# Altium PCB waffling60-MXHS.PcbDoc (part 1 of 3)
Units mm, origin at the board's own origin, x right, y up, seen from the top; angles counter-clockwise.
Board outline 284.81 x 94.3 mm, 2 copper layers (Component Side, Bottom Layer), stack 1.571 mm thick; 157 components, 101 nets, 956 pads, 124 vias.
Unrouted connection lines stored in the file: 1.
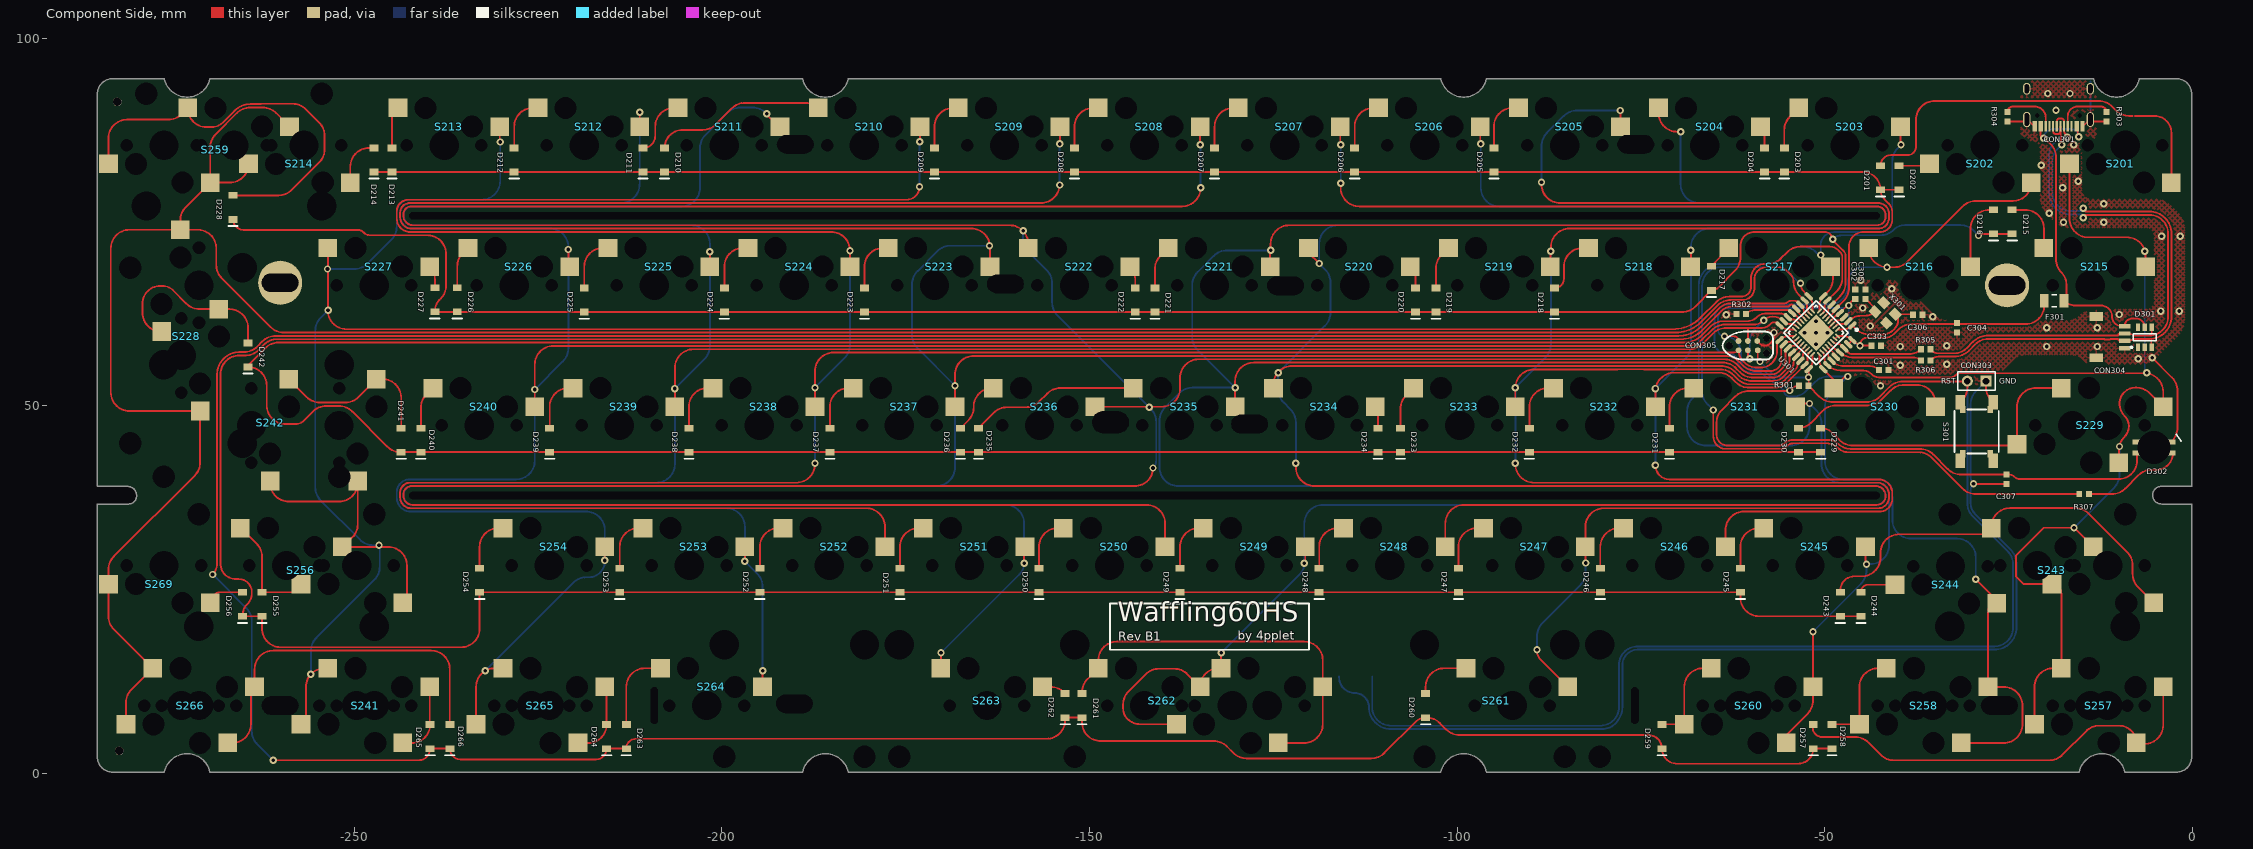
[diagram p0: Component Side view]
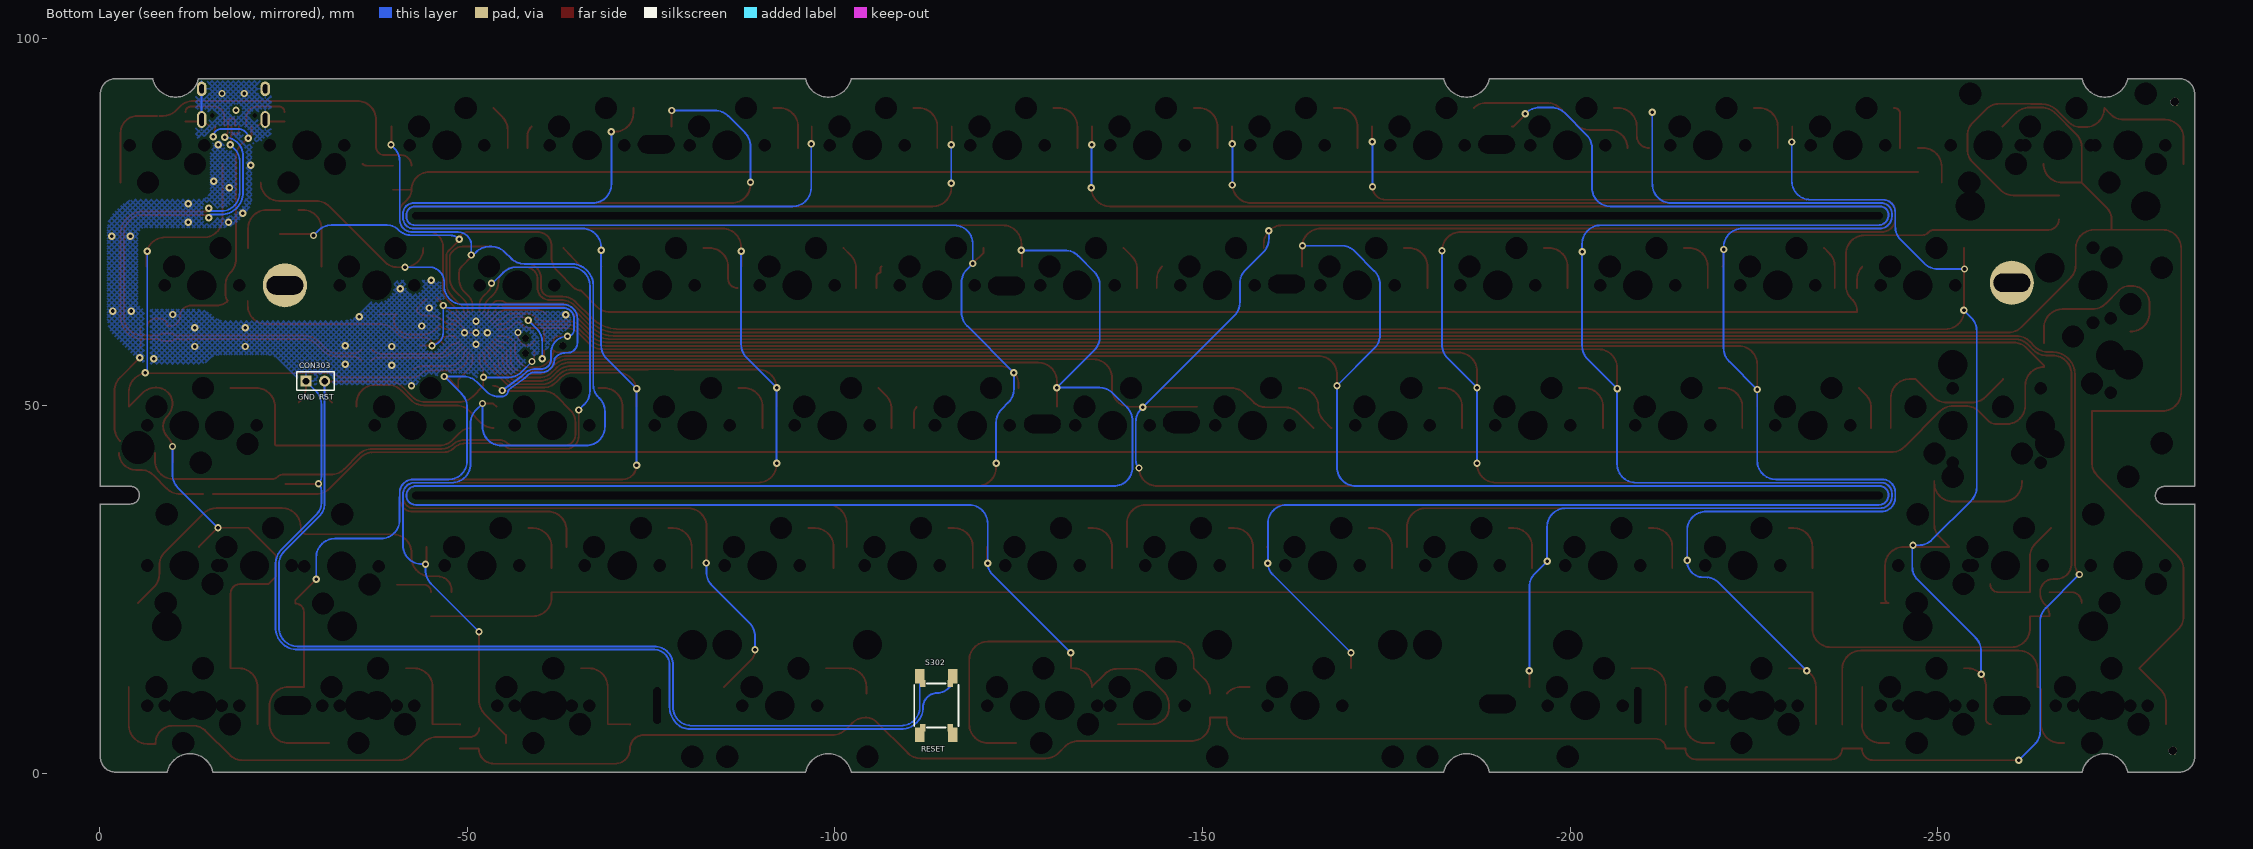
[diagram p1: Bottom Layer view, seen from below]

## Layer stack, top to bottom
Top Solder: solder mask 0.0102, Solder Resist, Dk 3.5
Component Side: signal copper 0.0356
Dielectric 1: core 1.5, FR-4, Dk 4.2
Bottom Layer: signal copper 0.0356
Solder Side: solder mask 0.0102, Solder Resist, Dk 3.5

## Board outline
-282.85,0.165 ccw(c-282.85,0.215) -282.85,0.165 cw(c-282.85,2.215) -284.9,2.215 -284.9,36.545 cw(c-284.861,36.576) -284.861,36.626 -280.67,36.626 ccw(c-280.67,37.719) -279.577,37.719 -279.577,37.795 ccw(c-280.797,37.795) -280.797,39.015 -284.85,39.015 cw(c-284.85,39.065) -284.9,39.065 -284.9,92.415 cw(c-282.85,92.415) -282.85,94.465 cw(c-282.85,94.415) -282.85,94.465 -275.85,94.465 cw(c-275.85,94.415) -275.801,94.426 cw(c-272.7,95.149) -275.801,94.426 ccw(c-272.7,95.149) -269.599,94.426 cw(c-269.55,94.415) -269.55,94.465 -189.05,94.465 cw(c-189.05,94.415) -189.001,94.426 ccw(c-185.9,95.149) -182.799,94.426 cw(c-182.75,94.415) -182.75,94.465 -102.25,94.465 cw(c-102.25,94.415) -102.201,94.426 cw(c-99.1,95.149) -102.201,94.426 ccw(c-99.1,95.149) -95.999,94.426 cw(c-95.95,94.415) -95.95,94.465 -13.477,94.465 cw(c-13.477,94.415) -13.428,94.426 cw(c-10.327,95.149) -13.428,94.426 ccw(c-10.327,95.149) -7.226,94.426 cw(c-7.177,94.415) -7.164,94.464 cw(c-7.15,94.415) -7.15,94.465 -2.15,94.465 cw(c-2.15,92.415) -0.1,92.415 -0.1,39.065 cw(c-0.15,39.065) -0.15,39.015 -4.242,39.015 ccw(c-4.242,37.846) -5.411,37.846 ccw(c-4.191,37.846) -4.191,36.626 -0.15,36.626 cw(c-0.15,36.576) -0.1,36.576 -0.1,2.215 cw(c-2.15,2.215) -2.15,0.165 -9.15,0.165 ccw(c-9.15,0.215) -9.15,0.165 cw(c-9.15,0.215) -9.199,0.204 ccw(c-12.3,-0.52) -15.401,0.204 ccw(c-12.3,-0.52) -15.401,0.204 cw(c-15.45,0.215) -15.45,0.165 -95.95,0.165 cw(c-95.95,0.215) -95.999,0.204 ccw(c-99.1,-0.52) -102.201,0.204 ccw(c-99.1,-0.52) -102.201,0.204 cw(c-102.25,0.215) -102.25,0.165 -182.75,0.165 cw(c-182.75,0.215) -182.799,0.204 cw(c-185.9,-0.52) -182.799,0.204 ccw(c-185.9,-0.52) -189.001,0.204 cw(c-189.05,0.215) -189.05,0.165 -269.55,0.165 cw(c-269.55,0.215) -269.55,0.165 cw(c-269.55,0.215) -269.599,0.204 ccw(c-272.7,-0.52) -275.801,0.204 ccw(c-272.7,-0.52) -275.801,0.204 cw(c-275.85,0.215) -275.85,0.165

## Design rules (kind name [scope] priority, off if disabled: settings)
Clearance [All] p1: gap=0.2 ignorepadtopadclearanceinfootprint=FALSE except(0: Arc-Hole Track-Hole SMDPad-Hole THPad-Hole Via-Hole Fill-Hole Poly-Hole Region-Hole Text-Hole; 0.254: THPad-THPad THPad-Via THPad-Fill THPad-Poly THPad-Region THPad-Text Via-Via Via-Fill Via-Poly Via-Region Via-Text Fill-Fill Fill-Poly Fill-Region Fill-Text Poly-Poly Poly-Region Poly-Text Region-Region Region-Text Text-Text)
ComponentClearance [InComponent('No Component') And OnLayer('Component Side')] p1: gap=0.254 collisioncheckmode=3 verticalgap=0.254 showdistances=FALSE
DiffPairsRouting DiffPairsRouting_USB [InDifferentialPairClass('All Differential Pairs')] p1: maxlimit=0.254 minlimit=0.203 mostfreqgap=0.203 toplayer_minwidth=0.152 toplayer_maxwidth=0.381 toplayer_prefwidth=0.152 bottomlayer_minwidth=0.152 bottomlayer_maxwidth=0.381 bottomlayer_prefwidth=0.152 maxuncoupledlength=12.7
DiffPairsRouting [All] p2: maxlimit=0.254 minlimit=0.254 mostfreqgap=0.254 toplayer_minwidth=0.381 toplayer_maxwidth=0.381 toplayer_prefwidth=0.381 bottomlayer_minwidth=0.381 bottomlayer_maxwidth=0.381 bottomlayer_prefwidth=0.381 maxuncoupledlength=12.7
HoleSize [All] p1: absolutevalues=TRUE maxlimit=20 minlimit=0.025 maxpercent=80.000 minpercent=20.000
MatchedLengths MatchedLengths_USB_DiffPairs_1 [All] p1: tolerance=0.127 checknetsindiffpair=TRUE checkdiffpairvsdiffpair=FALSE checkxsignals=FALSE checkothers=FALSE
MatchedLengths MatchedLengths_USB_DiffPairs [All] p2: tolerance=0.127 checknetsindiffpair=TRUE checkdiffpairvsdiffpair=FALSE checkxsignals=FALSE checkothers=FALSE
PolygonConnect PolygonConnect_1 [All vs IsVia] p1: connectstyle=Direct reliefconductorwidth=0.254 reliefentries=4 polygonreliefangle="90 Angle" airgapwidth=0.254
PolygonConnect [All] p2: connectstyle=Relief reliefconductorwidth=0.254 reliefentries=4 polygonreliefangle="90 Angle" airgapwidth=0.254
RoutingVias [All] p1: holewidth=0.711 width=1.27 viastyle="Through Hole" minholewidth=0.711 minwidth=1.27 maxholewidth=0.711 maxwidth=1.27
SolderMaskExpansion [All] p1: expansion=0.102 istentingtop=FALSE
Width [All] p1: maxlimit=0.254 minlimit=0.203 preferedwidth=0.254
27 further rules are at their usual default settings.

## Classes and differential pairs
component class Designator: C201 C202 C203 C204 C205 C206 D201 D202 D203 D204 D205 D206 D207 D208 D209 D210 D211 D212 D213 D214 D215 D216 D217 D218 D219 D220 D221 D222 D223 D224 D225 D226 D227 D228 D229 D230 D231 D232 D233 D234 D235 D236 D237 D238 D239 D240 D241 D242 D243 D244 D245 D246 D247 D248 D249 D250 D251 D252 D253 D254 D255 D256 D257 D258 D259 D260 D261 D262 D263 D264 D265 D266 D268 S201 S202 S203 S204 S205 S206 S207 S208 S209 S210 S211 S212 S213 S214 S215 S216 S217 S218 S219 S220 S221 S222 S223 S224 S225 S226 S227 S228 S229 S230 S231 S232 S233 S234 S235 S236 S237 S238 S239 S240 S241 S242 S243 S244 S245 S246 S247 S248 S249 S250 S251 S252 S253 S254 S256 S257 S258 S259 S260 S261 S262 S263 S264 S265 S266 S269
differential pair D: +D_P -D_N
differential pair D_PRE: +D_PRE_P -D_PRE_N

## Components (designator, comment, footprint, x,y, rotation, side; value= is the part's Value field where it differs from the comment)
C301 "" C0603[1608] -41.984,54.864 r180 top value=1uF
C302 "" C0603[1608] -45.847,65.166 r270 top value=0.1uF
C303 "" C0603[1608] -43,58.166 r180 top value=0.1uF
C304 "" C0603[1608] -32.004,60.579 r90 top value=4,7uF
C305 "" C0603[1608] -44.45,65.166 r270 top value=36pF
C306 "" C0603[1608] -37.338,62.357 r180 top value=36pF
C307 "" C0603[1608] -25.273,40.005 r90 top value=0.1uF
CON301 "TYPE-C-31-M-12" TYPE-C-31-M-12 -18.2,88 r180 top locked
CON303 "Header 2" HDR1X2 -28.067,53.34 r180 top
CON304 "Header 5" "JST SM04B-SRSS-TB" -13.081,62.115 r270 top locked
CON305 "TC2030-IDC" TC2030-IDC-NL -60.452,58.166 r0 top locked
D201 "Diode" SOD-123 -42.418,81 r90 top
D202 "Diode" SOD-123 -39.878,81 r90 top
D203 "Diode" SOD-123 -55.499,83.415 r90 top
D204 "Diode" SOD-123 -58.166,83.415 r90 top
D205 "Diode" SOD-123 -94.996,83.415 r90 top
D206 "Diode" SOD-123 -113.919,83.415 r90 top
D207 "Diode" SOD-123 -132.969,83.415 r90 top
D208 "Diode" SOD-123 -152.019,83.415 r90 top
D209 "Diode" SOD-123 -171.069,83.415 r90 top
D210 "Diode" SOD-123 -207.772,83.415 r90 top
D211 "Diode" SOD-123 -210.693,83.415 r90 top
D212 "Diode" SOD-123 -228.219,83.415 r90 top
D213 "Diode" SOD-123 -244.856,83.415 r90 top
D214 "Diode" SOD-123 -247.269,83.415 r90 top
D215 "Diode" SOD-123 -24.511,75 r90 top
D216 "Diode" SOD-123 -27.051,75 r90 top
D217 "Diode" SOD-123 -65.405,67.31 r90 top
D218 "Diode" SOD-123 -86.741,64.365 r90 top
D219 "Diode" SOD-123 -102.87,64.365 r90 top
D220 "Diode" SOD-123 -105.664,64.365 r90 top
D221 "Diode" SOD-123 -141.097,64.365 r90 top
D222 "Diode" SOD-123 -143.764,64.365 r90 top
D223 "Diode" SOD-123 -180.594,64.365 r90 top
D224 "Diode" SOD-123 -199.644,64.365 r90 top
D225 "Diode" SOD-123 -218.694,64.365 r90 top
D226 "Diode" SOD-123 -235.966,64.389 r90 top
D227 "Diode" SOD-123 -239.014,64.389 r90 top
D228 "Diode" SOD-123 -266.446,76.962 r90 top
D229 "Diode" SOD-123 -50.546,45.315 r90 top
D230 "Diode" SOD-123 -53.594,45.315 r90 top
D231 "Diode" SOD-123 -71.12,45.315 r90 top
D232 "Diode" SOD-123 -90.17,45.315 r90 top
D233 "Diode" SOD-123 -107.696,45.315 r90 top
D234 "Diode" SOD-123 -110.744,45.315 r90 top
D235 "Diode" SOD-123 -165.1,45.315 r90 top
D236 "Diode" SOD-123 -167.513,45.315 r90 top
D237 "Diode" SOD-123 -185.293,45.315 r90 top
D238 "Diode" SOD-123 -204.47,45.315 r90 top
D239 "Diode" SOD-123 -223.393,45.315 r90 top
D240 "Diode" SOD-123 -240.919,45.315 r90 top
D241 "Diode" SOD-123 -243.586,45.315 r90 top
D242 "Diode" SOD-123 -264.414,56.896 r90 top
D243 "Diode" SOD-123 -47.879,23 r90 top
D244 "Diode" SOD-123 -45.085,23 r90 top
D245 "Diode" SOD-123 -61.468,26.265 r90 top
D246 "Diode" SOD-123 -80.518,26.265 r90 top
D247 "Diode" SOD-123 -99.822,26.265 r90 top
D248 "Diode" SOD-123 -118.745,26.265 r90 top
D249 "Diode" SOD-123 -137.668,26.265 r90 top
D250 "Diode" SOD-123 -156.845,26.265 r90 top
D251 "Diode" SOD-123 -175.768,26.265 r90 top
D252 "Diode" SOD-123 -194.818,26.265 r90 top
D253 "Diode" SOD-123 -213.868,26.265 r90 top
D254 "Diode" SOD-123 -232.918,26.265 r90 top
D255 "Diode" SOD-123 -262.509,23 r90 top
D256 "Diode" SOD-123 -265.176,23 r90 top
D257 "Diode" SOD-123 -51.562,5 r90 top
D258 "Diode" SOD-123 -49.022,5 r90 top
D259 "Diode" SOD-123 -72.136,5 r90 top
D260 "Diode" SOD-123 -104.267,9.215 r90 top
D261 "Diode" SOD-123 -151.003,9.215 r90 top
D262 "Diode" SOD-123 -153.289,9.215 r90 top
D263 "Diode" SOD-123 -212.979,5 r90 top
D264 "Diode" SOD-123 -215.646,5 r90 top
D265 "Diode" SOD-123 -239.649,5 r90 top
D266 "Diode" SOD-123 -236.982,5 r90 top
D301 "SRV05" SOT-23-6 -6.477,59.309 r90 top
D302 "SK6812MINI-E" SK6812MINI-E -5.221,44.311 r180 top
F301 "Fuse Thermal" C1206[3216] -18.796,64.262 r0 top
R301 "Res1" R0603[1608] -52.832,52.705 r0 top value=10K
R302 "Res1" R0603[1608] -61.341,62.484 r180 top value=10K
R303 "Res1" R0603[1608] -11.684,89.281 r270 top value=5k1
R304 "Res1" R0603[1608] -25.146,89.281 r270 top value=5k1
R305 "Res1" R0603[1608] -36.27,57.658 r0 top value=22
R306 "Res1" R0603[1608] -36.27,56.134 r0 top value=22
R307 "Res1" R0603[1608] -14.732,37.973 r180 top value=470
S201 "MX" MXHS-switch -9.15,85.415 r0 bottom
S202 "MX" MXHS-switch_Switched_Pol -28.2,85.415 r0 bottom locked
S203 "MX" MXHS-switch -47.25,85.415 r180 bottom locked
S204 "MX" MXHS-switch_Switched_Pol -66.3,85.415 r180 bottom locked
S205 "MX" MXHS-switch -85.35,85.415 r180 bottom locked
S206 "MX" MXHS-switch -104.4,85.415 r180 bottom locked
S207 "MX" MXHS-switch -123.45,85.415 r180 bottom locked
S208 "MX" MXHS-switch -142.5,85.415 r180 bottom locked
S209 "MX" MXHS-switch -161.55,85.415 r180 bottom locked
S210 "MX" MXHS-switch -180.6,85.415 r180 bottom locked
S211 "MX" MXHS-switch -199.65,85.415 r180 bottom locked
S212 "MX" MXHS-switch -218.7,85.415 r180 bottom locked
S213 "MX" MXHS-switch -237.75,85.415 r180 bottom locked
S214 "MX" MXHS-SWITCH -256.8,85.415 r0 bottom locked
S215 "MX" MXHS-switch -13.912,66.365 r180 bottom locked
S216 "MX" MXHS-switch_Switched_Pol -37.725,66.365 r180 bottom locked
S217 "MX" MXHS-switch -56.775,66.365 r180 bottom locked
S218 "MX" MXHS-switch -75.825,66.365 r180 bottom locked
S219 "MX" MXHS-switch -94.875,66.365 r180 bottom locked
S220 "MX" MXHS-switch_Switched_Pol -113.925,66.365 r180 bottom locked
S221 "MX" MXHS-switch -132.975,66.365 r180 bottom locked
S222 "MX" MXHS-switch_Switched_Pol -152.025,66.365 r180 bottom locked
S223 "MX" MXHS-switch -171.075,66.365 r180 bottom locked
S224 "MX" MXHS-switch -190.125,66.365 r180 bottom locked
S225 "MX" MXHS-switch -209.175,66.365 r180 bottom locked
S226 "MX" MXHS-switch -228.225,66.365 r180 bottom locked
S227 "MX" MXHS-switch_Switched_Pol -247.275,66.365 r180 bottom locked
S228 "MX" "MXHS-SWITCH - PIPE_ISO_ENTER" -271.087,66.365 r0 bottom locked
S229 "MX" "MXHS-SWITCH - CAPS_STEPPED_DUAL" -16.294,47.315 r180 bottom locked
S230 "MX" MXHS-switch_Switched_Pol -42.487,47.315 r180 bottom locked
S231 "MX" MXHS-switch -61.537,47.315 r180 bottom locked
S232 "MX" MXHS-switch -80.587,47.315 r180 bottom locked
S233 "MX" MXHS-switch -99.637,47.315 r180 bottom locked
S234 "MX" MXHS-switch_Switched_Pol -118.687,47.315 r180 bottom locked
S235 "MX" MXHS-SWITCH -137.737,47.315 r180 bottom locked
S236 "MX" MXHS-switch -156.787,47.315 r180 bottom locked
S237 "MX" MXHS-switch -175.837,47.315 r180 bottom locked
S238 "MX" MXHS-switch -194.887,47.315 r180 bottom locked
S239 "MX" MXHS-switch -213.937,47.315 r180 bottom locked
S240 "MX" MXHS-switch -232.987,47.315 r180 bottom locked
S241 "MX" "MXHS-SWITCH - R_WIN" -247.274,9.215 r180 bottom locked
S242 "MX" "MXHS-switch - Enter_ANSI_ISO_KEY_V2" -263.95,47.315 r180 bottom locked
S243 "MX" "MXHS-SWITCH - LEFT SHIFT" -21.056,28.265 r180 bottom locked
S244 "MX" MXHS-switch -32.893,28.194 r0 bottom locked
S245 "MX" MXHS-switch -52.012,28.265 r180 bottom locked
S246 "MX" MXHS-switch -71.062,28.265 r180 bottom locked
S247 "MX" MXHS-switch -90.112,28.265 r180 bottom locked
S248 "MX" MXHS-switch -109.162,28.265 r180 bottom locked
S249 "MX" MXHS-switch -128.212,28.265 r180 bottom locked
S250 "MX" MXHS-switch -147.262,28.265 r180 bottom locked
S251 "MX" MXHS-switch -166.312,28.265 r180 bottom locked
S252 "MX" MXHS-switch -185.362,28.265 r180 bottom locked
S253 "MX" MXHS-switch -204.412,28.265 r180 bottom locked
S254 "MX" MXHS-switch -223.462,28.265 r180 bottom locked
S256 "MX" "MXHS-switch - right shift" -259.18,28.265 r180 bottom
S257 "MX" "MXHS-SWITCH - L_CTRL" -13.912,9.215 r180 bottom locked
S258 "MX" "MXHS-SWITCH - L_WIN" -37.724,9.215 r180 bottom locked
S259 "MX" "MXHS-SWITCH - BACKSPACE" -266.325,85.415 r180 bottom locked
S260 "MX" "MXHS-SWITCH - L_ALT" -61.537,9.215 r180 bottom locked
S261 "MX" "MXHS-SWITCH - L SPLIT SPACE" -102.018,9.215 r0 bottom locked
S262 "MX" "MXHS-SWITCH - SPACE_V2" -142.499,9.215 r180 bottom locked
S263 "MX" "MXHS-SWITCH - R SPLIT SPACE" -163.931,9.215 r0 bottom locked
S264 "MX" MXHS-switch -202.031,9.215 r180 bottom locked
S265 "MX" "MXHS-SWITCH - R_ALT_V2" -223.462,9.215 r180 bottom locked
S266 "MX" "MXHS-SWITCH - R_CTRL" -271.087,9.215 r180 bottom locked
S269 "MX" MXHS-SWITCH -275.85,28.265 r0 bottom locked
S301 "SW-PB" "Combo switch"#1 -29.337,46.482 r270 top
S302 "SW-PB" "Combo switch"#2 -113.792,9.215 r270 bottom
U301 "ATMEGA32U2" ATMEGA32U2-COMBO -51.184,59.918 r225 top
X301 "XTAL" YSX321SL -41.783,62.611 r135 top

## Footprints (in the part's own frame and the unit in brackets; to place one, negate y for a bottom-side part, rotate by r counter-clockwise, add the part's x,y. Pads: shape width x height; smd on the part's side, far side on the other; paste and mask are expansions set on the pad)
ATMEGA32U2-COMBO [mm]
  oval 1.4x0.55 smd: 1(-4.2,2.8) 2(-4.2,2) 3(-4.2,1.2) 4(-4.2,0.4) 5(-4.2,-0.4) 6(-4.2,-1.2) 7(-4.2,-2) 8(-4.2,-2.8) 17(4.2,-2.8) 18(4.2,-2) 19(4.2,-1.2) 20(4.2,-0.4) 21(4.2,0.4) 22(4.2,1.2) 23(4.2,2) 24(4.2,2.8)
  oval 0.85x0.25 smd: 1(-2.4,1.75) 2(-2.4,1.25) 3(-2.4,0.75) 4(-2.4,0.25) 5(-2.4,-0.25) 6(-2.4,-0.75) 7(-2.4,-1.25) 8(-2.4,-1.75) 17(2.4,-1.75) 18(2.4,-1.25) 19(2.4,-0.75) 20(2.4,-0.25) 21(2.4,0.25) 22(2.4,0.75) 23(2.4,1.25) 24(2.4,1.75)
  oval 0.55x1.4 smd: 9(-2.8,-4.2) 10(-2,-4.2) 11(-1.2,-4.2) 12(-0.4,-4.2) 13(0.4,-4.2) 14(1.2,-4.2) 15(2,-4.2) 16(2.8,-4.2) 25(2.8,4.2) 26(2,4.2) 27(1.2,4.2) 28(0.4,4.2) 29(-0.4,4.2) 30(-1.2,4.2) 31(-2,4.2) 32(-2.8,4.2)
  oval 0.25x0.85 smd: 9(-1.75,-2.4) 10(-1.25,-2.4) 11(-0.75,-2.4) 12(-0.25,-2.4) 13(0.25,-2.4) 14(0.75,-2.4) 15(1.25,-2.4) 16(1.75,-2.4) 25(1.75,2.4) 26(1.25,2.4) 27(0.75,2.4) 28(0.25,2.4) 29(-0.25,2.4) 30(-0.75,2.4) 31(-1.25,2.4) 32(-1.75,2.4)
  rect 3.5x3.5 smd: 28(0,0)
  silkscreen extent -4.32,-3.1 3.1,3.75, body extent -2.51,-2.51 2.51,2.51, height 1
C0603[1608] [mm] "Chip Resistor, 2-Leads, Body 1,57x0,80mm, IPC Medium Density"
  rect 0.8x0.85 smd: 1(-0.65,0) 2(0.65,0)
  body extent -0.83,-0.43 0.82,0.43, height 0.5
C1206[3216] [mm]
  rect 1.2x1.8 smd: 1(-1.35,0) 2(1.35,0)
  silkscreen extent -0.35,-0.8 0.35,0.8, body extent -1.6,-0.9 1.6,0.9, height 1.2
"Combo switch"#1 [mm] "Wurth Electronics Inc."
  rect 2x1.3 smd: 1(-3.975,2.25) 2(-3.975,-2.25) ""(3.975,2.25) ""(3.975,-2.25)
  rect 1x0.75 smd: 1(-3,1.875) 2(-3,-1.875) ""(3,1.875) ""(3,-1.875)
  round 1 on Mech13: ""(0,0)
  silkscreen extent -3,-3 3,3, body extent -4.5,-3.1 4.5,3.1, height 5
"Combo switch"#2 [mm] "Wurth Electronics Inc."
  rect 2x1.3 smd: 1(-3.975,2.25) 2(-3.975,-2.25) ""(3.975,-2.25) ""(3.975,2.25)
  rect 1x0.75 smd: 1(-3,1.875) 2(-3,-1.875) ""(3,-1.875) ""(3,1.875)
  round 1 on Mech16: ""(0,0)
  silkscreen extent -3,-3 3,3, body extent -3.25,-2.55 3.25,2.55, height 2
HDR1X2 [mm] "Connector; Header; 2 Position"
  rect 1.5x1.5 hole 0.9: 1(0,0)
  round 1.5 hole 0.9: 2(2.54,0)
  silkscreen extent -1.27,-1.27 3.81,1.27
"JST SM04B-SRSS-TB" [mm]
  rect 0.6x1.55 smd: 1(1.3,3.875) 2(2.3,3.875) 3(3.3,3.875) 4(4.3,3.875)
  rect 1.2x1.8 smd: 5(0,0) 5(5.6,0)
  body extent -0.21,-0.76 5.79,4.19, height 3.25
MXHS-switch [mm]
  rect 2.55x2.5 smd far side: 1(6.29,5.08) 2(-7.56,2.54)
  round 1 hole 1.702 unplated: ""(-5.08,0) ""(5.08,0)
  round 0 hole 3 unplated: ""(-3.81,2.54) ""(2.54,5.08)
  round 1 hole 3.988 unplated: ""(0,0)
  body extent -7.76,0.97 6.74,6.86, height 0.8
MXHS-SWITCH [mm]
  rect 2.55x2.5 smd far side: 1(6.29,5.08) 2(-7.56,2.54)
  round 1 hole 1.702 unplated: ""(-5.08,0) ""(5.08,0)
  round 0 hole 3 unplated: ""(-3.81,2.54) ""(2.54,5.08)
  round 1 hole 3.988 unplated: ""(0,0)
  body extent -7.76,0.97 6.74,6.86, height 0.8
"MXHS-SWITCH - BACKSPACE" [mm]
  rect 2.55x2.5 smd far side: 1(6.29,5.08) 1(17.085,-2.54) 2(-7.56,2.54) 2(3.235,-5.08)
  round 1.524 hole 3.988 unplated: ""(-11.938,-8.255) ""(11.938,-8.255)
  round 1.524 hole 3.048 unplated: ""(-11.938,6.985) ""(11.938,6.985)
  round 1 hole 1.702 unplated: ""(-5.08,0) ""(-5.08,0) ""(4.445,0) ""(4.445,0) ""(5.08,0) ""(5.08,0) ""(14.605,0) ""(14.605,0)
  round 0 hole 3 unplated: ""(-3.81,2.54) ""(2.54,5.08) ""(6.985,-5.08) ""(13.335,-2.54)
  round 1 hole 3.988 unplated: ""(0,0) ""(9.525,0)
  round 1 on Mech14: ""(0,0) ""(0,0) ""(9.525,0) ""(9.525,0)
  body extent -7.76,-6.86 17.28,6.86, height 0.8
"MXHS-SWITCH - CAPS_STEPPED_DUAL" [mm]
  rect 2.55x2.5 smd far side: 1(1.528,5.08) 1(7.56,-2.54) 2(-12.323,2.54) 2(-6.29,-5.08)
  round 1 hole 1.702 unplated: ""(-9.842,0) ""(5.08,0)
  round 0 hole 3 unplated: ""(-8.572,2.54) ""(-2.54,-5.08) ""(-2.222,5.08) ""(3.81,-2.54)
  round 1 hole 3.988 unplated: ""(-4.763,0) ""(0,0)
  round 1 on Mech14: ""(-4.763,0) ""(0,0)
  body extent -12.52,-6.86 7.76,6.86, height 0.8
"MXHS-switch - Enter_ANSI_ISO_KEY_V2" [mm]
  rect 2.5x2.55 smd far side: 1(-16.986,6.29) 1(-5.08,6.29) 2(-14.446,-7.56) 2(-2.54,-7.56)
  round 0 hole 3 unplated: ""(-16.986,2.54) ""(-14.446,-3.81) ""(-5.08,2.54) ""(-2.54,-3.81)
  round 1.524 hole 3.048 unplated: ""(-11.938,-6.985) ""(11.938,-6.985)
  round 1.524 hole 3.988 unplated: ""(-11.938,8.255) ""(11.938,8.255)
  round 1 hole 1.702 unplated: ""(-11.906,-5.08) ""(-11.906,5.08) ""(0,-5.08) ""(0,5.08)
  round 1 hole 3.988 unplated: ""(-11.906,0) ""(0,0)
  round 1 on Mech14: ""(-11.906,0) ""(-11.906,0) ""(-11.906,0) ""(0,0) ""(0,0)
  body extent -18.76,-7.76 -0.97,6.74, height 0.8
"MXHS-SWITCH - L SPLIT SPACE" [mm]
  rect 2.55x2.5 smd far side: 1(3.235,-5.08) 2(17.085,-2.54)
  round 1.524 hole 3.988 unplated: ""(-2.413,-8.255)
  round 1.524 hole 3.048 unplated: ""(-2.413,6.985)
  round 1 hole 1.702 unplated: ""(4.445,0) ""(14.605,0)
  round 0 hole 3 unplated: ""(6.985,-5.08) ""(13.335,-2.54)
  round 1 hole 3.988 unplated: ""(9.525,0)
  round 1 on Mech14: ""(9.525,0)
  body extent 2.78,-6.86 17.28,-0.97, height 0.8
"MXHS-SWITCH - L_ALT" [mm]
  rect 2.55x2.5 smd far side: 1(3.909,5.08) 1(7.56,-2.54) 2(-9.941,2.54) 2(-6.29,-5.08)
  round 1 hole 1.702 unplated: ""(-7.461,0) ""(-5.08,0) ""(2.699,0) ""(5.08,0)
  round 0 hole 3 unplated: ""(-6.191,2.54) ""(-2.54,-5.08) ""(0.159,5.08) ""(3.81,-2.54)
  round 1 hole 3.988 unplated: ""(-2.381,0) ""(0,0)
  round 1 on Mech14: ""(-2.381,0) ""(0,0) ""(0,0) ""(0,0)
  body extent -10.14,-6.86 7.76,6.86, height 0.8
"MXHS-SWITCH - L_CTRL" [mm]
  rect 2.55x2.5 smd far side: 1(3.909,5.08) 1(7.56,-2.54) 2(-9.941,2.54) 2(-6.29,-5.08)
  round 1 hole 1.702 unplated: ""(-7.461,0) ""(-5.08,0) ""(2.699,0) ""(5.08,0)
  round 0 hole 3 unplated: ""(-6.191,2.54) ""(-2.54,-5.08) ""(0.159,5.08) ""(3.81,-2.54)
  round 1 hole 3.988 unplated: ""(-2.381,0) ""(0,0)
  round 1 on Mech14: ""(-2.381,0) ""(0,0) ""(0,0) ""(0,0)
  body extent -10.14,-6.86 7.76,6.86, height 0.8
"MXHS-SWITCH - L_WIN" [mm]
  rect 2.55x2.5 smd far side: 1(3.909,5.08) 1(7.56,-2.54) 2(-9.941,2.54) 2(-6.29,-5.08)
  round 1 hole 1.702 unplated: ""(-7.461,0) ""(-5.08,0) ""(2.699,0) ""(5.08,0)
  round 0 hole 3 unplated: ""(-6.191,2.54) ""(-2.54,-5.08) ""(0.159,5.08) ""(3.81,-2.54)
  round 1 hole 3.988 unplated: ""(-2.381,0) ""(0,0)
  round 1 on Mech14: ""(-2.381,0) ""(0,0) ""(0,0) ""(0,0)
  body extent -10.14,-6.86 7.76,6.86, height 0.8
"MXHS-SWITCH - LEFT SHIFT" [mm]
  rect 2.55x2.5 smd far side: 1(-15.815,-5.08) 1(6.29,5.08) 2(-7.56,2.54) 2(-1.965,-2.54)
  round 1 hole 1.702 unplated: ""(-14.605,0) ""(-5.08,0) ""(-4.445,0) ""(5.08,0)
  round 0 hole 3 unplated: ""(-12.065,-5.08) ""(-5.715,-2.54) ""(-3.81,2.54) ""(2.54,5.08)
  round 1.524 hole 3.988 unplated: ""(-11.938,-8.255) ""(11.938,-8.255)
  round 1.524 hole 3.048 unplated: ""(-11.938,6.985) ""(11.938,6.985)
  round 1 hole 3.988 unplated: ""(-9.525,0) ""(0,0)
  round 1 on Mech14: ""(0,0)
  body extent -16.27,-6.86 6.74,6.86, height 0.8
"MXHS-SWITCH - PIPE_ISO_ENTER" [mm]
  rect 2.5x2.55 smd far side: 1(-5.08,6.29) 1(2.699,3.235) 2(-2.54,-7.56) 2(0.159,17.085)
  round 1.524 hole 3.048 unplated: ""(-9.366,-2.413) ""(-9.366,21.463)
  round 0 hole 3 unplated: ""(-5.08,2.54) ""(-2.54,-3.81) ""(0.159,13.335) ""(2.699,6.985)
  round 1 hole 1.702 unplated: ""(-2.381,4.445) ""(-2.381,14.605) ""(0,-5.08) ""(0,5.08)
  round 1 hole 3.988 unplated: ""(-2.381,9.525) ""(0,0)
  round 1 on Mech14: ""(-2.381,9.525) ""(0,0)
  round 1.524 hole 3.988 unplated: ""(5.874,-2.413) ""(5.874,21.463)
  body extent -6.86,-7.76 4.48,17.28, height 0.8
"MXHS-SWITCH - R SPLIT SPACE" [mm]
  rect 2.55x2.5 smd far side: 1(7.56,-2.54) 2(-6.29,-5.08)
  round 1.524 hole 3.988 unplated: ""(-11.938,-8.255) ""(11.938,-8.255)
  round 1.524 hole 3.048 unplated: ""(-11.938,6.985) ""(11.938,6.985)
  round 1 hole 1.702 unplated: ""(-5.08,0) ""(5.08,0)
  round 0 hole 3 unplated: ""(-2.54,-5.08) ""(3.81,-2.54)
  round 1 hole 3.988 unplated: ""(0,0)
  round 1 on Mech14: ""(0,0)
  body extent -6.74,-6.86 7.76,-0.97, height 0.8
"MXHS-SWITCH - R_ALT_V2" [mm] "No infinity hacker"
  rect 2.55x2.5 smd far side: 1(-7.56,2.54) 1(-3.909,-5.08) 2(6.29,5.08) 2(9.941,-2.54)
  round 1 hole 1.702 unplated: ""(-5.08,0) ""(-2.699,0) ""(5.08,0) ""(7.461,0)
  round 0 hole 3 unplated: ""(-3.81,2.54) ""(-0.159,-5.08) ""(2.54,5.08) ""(6.191,-2.54)
  round 1 hole 3.988 unplated: ""(0,0) ""(2.381,0)
  round 1 on Mech14: ""(0,0) ""(0,0) ""(0,0) ""(2.381,0) ""(2.381,0) ""(2.381,0)
  body extent -7.76,-6.86 10.14,6.86, height 0.8
"MXHS-SWITCH - R_CTRL" [mm]
  rect 2.55x2.5 smd far side: 1(-7.56,2.54) 1(-3.909,-5.08) 2(6.29,5.08) 2(9.941,-2.54)
  round 1 hole 1.702 unplated: ""(-5.08,0) ""(-2.699,0) ""(5.08,0) ""(7.461,0)
  round 0 hole 3 unplated: ""(-3.81,2.54) ""(-0.159,-5.08) ""(2.54,5.08) ""(6.191,-2.54)
  round 1 hole 3.988 unplated: ""(0,0) ""(2.381,0)
  round 1 on Mech14: ""(0,0) ""(0,0) ""(0,0) ""(2.381,0) ""(2.381,0) ""(2.381,0)
  body extent -7.76,-6.86 10.14,6.86, height 0.8
"MXHS-SWITCH - R_WIN" [mm]
  rect 2.55x2.5 smd far side: 1(6.29,5.08) 1(9.941,-2.54) 2(-7.56,2.54) 2(-3.909,-5.08)
  round 1 hole 1.702 unplated: ""(-5.08,0) ""(-2.699,0) ""(5.08,0) ""(7.461,0)
  round 0 hole 3 unplated: ""(-3.81,2.54) ""(-0.159,-5.08) ""(2.54,5.08) ""(6.191,-2.54)
  round 1 hole 3.988 unplated: ""(0,0) ""(2.381,0)
  round 1 on Mech14: ""(0,0) ""(0,0) ""(0,0) ""(2.381,0) ""(2.381,0) ""(2.381,0)
  body extent -7.76,-6.86 10.14,6.86, height 0.8
"MXHS-switch - right shift" [mm]
  rect 2.55x2.5 smd far side: 1(-1.965,-2.54) 1(6.29,5.08) 2(-15.815,-5.08) 2(-7.56,2.54)
  round 1 hole 1.702 unplated: ""(-14.605,0) ""(-5.08,0) ""(-4.445,0) ""(5.08,0)
  round 0 hole 3 unplated: ""(-12.065,-5.08) ""(-5.715,-2.54) ""(-3.81,2.54) ""(2.54,5.08)
  round 1.524 hole 3.988 unplated: ""(-11.938,-8.255) ""(11.938,-8.255)
  round 1.524 hole 3.048 unplated: ""(-11.938,6.985) ""(11.938,6.985)
  round 1 hole 3.988 unplated: ""(-9.525,0) ""(0,0)
  round 1 on Mech14: ""(-9.525,0)
  body extent -16.27,-6.86 6.74,6.86, height 0.8
"MXHS-SWITCH - SPACE_V2" [mm]
  rect 2.55x2.5 smd far side: 1(-10.386,5.08) 1(-7.56,2.54) 1(-4.346,-2.54) 2(-24.236,2.54) 2(-18.196,-5.08) 2(6.29,5.08)
  round 1.524 hole 3.048 unplated: ""(-61.91,-6.985) ""(-57.15,-6.985) ""(38.09,-6.985) ""(57.15,-6.985)
  round 1.524 hole 3.988 unplated: ""(-61.91,8.255) ""(-57.15,8.255) ""(38.09,8.255) ""(57.15,8.255)
  round 1 hole 1.702 unplated: ""(-21.756,0) ""(-6.826,0) ""(-5.08,0) ""(5.08,0)
  round 0 hole 3 unplated: ""(-20.486,2.54) ""(-14.446,-5.08) ""(-14.136,5.08) ""(-8.096,-2.54) ""(-3.81,2.54) ""(2.54,5.08)
  round 1 hole 3.988 unplated: ""(-16.676,0) ""(-11.906,0) ""(0,0)
  round 1 on Mech14: ""(-16.676,0) ""(-11.906,0) ""(0,0)
  body extent -24.43,-6.86 6.74,6.86, height 0.8
MXHS-switch_Switched_Pol [mm]
  rect 2.55x2.5 smd far side: 1(-7.56,2.54) 2(6.29,5.08)
  round 1 hole 1.702 unplated: ""(-5.08,0) ""(5.08,0)
  round 0 hole 3 unplated: ""(-3.81,2.54) ""(2.54,5.08)
  round 1 hole 3.988 unplated: ""(0,0)
  body extent -7.76,0.97 6.74,6.86, height 0.8
R0603[1608] [mm] "Chip Resistor, 2-Leads, Body 1,57x0,80mm, IPC Medium Density"
  rect 0.8x0.85 smd: 1(-0.65,0) 2(0.65,0)
  body extent -0.83,-0.43 0.82,0.43, height 0.5
SK6812MINI-E [mm]
  rect 1.2x0.7 smd: 1(2.3,0.75) 2(2.3,-0.75) 3(-2.3,-0.75) 4(-2.3,0.75)
  round 1 hole 4.5 unplated: ""(0,0)
  silkscreen extent -3.68,-1.78 -3.05,-0.89, body extent -2.79,-1.4 2.79,1.4, height 0.88
SOD-123 [mm]
  rect 0.91x1.22 smd: 1(1.635,0) 2(-1.635,0)
  silkscreen extent -2.54,-0.64 -2.54,0.63, body extent -1.87,-0.85 1.88,0.85, height 1.2
SOT-23-6 [mm]
  rect 1x0.55 smd: 1(-1.375,0.95) 2(-1.375,0) 3(-1.375,-0.95) 4(1.375,-0.95) 5(1.375,0) 6(1.375,0.95)
  silkscreen extent -1.5,-1.55 0.46,1.92, body extent -1.37,-1.44 1.47,1.49, height 1.05
TC2030-IDC-NL [mm] "Tag-Connect 6-Pin with No Legs (PN# TC2030-IDC-NL)"
  round 0.9 hole 0.995 unplated: 0(-2.54,0) 0(2.54,-1.016) 0(2.54,1.016)
  round 0.79 smd paste-0.39: 1(-1.27,-0.635) 2(-1.27,0.635) 3(0,-0.635) 4(0,0.635) 5(1.35,-0.635) 6(1.27,0.635)
  silkscreen extent -3.43,-1.91 3.43,1.9
TYPE-C-31-M-12 [mm]
  rect 0.6x1.45 smd: A1B12(-3.25,0) A4B9(-2.45,0) B1A12(3.25,0) B4A9(2.45,0)
  rect 0.3x1.45 smd: A5(-1.25,0) A6(-0.25,0) A7(0.25,0) A8(1.25,0) B5(1.75,0) B6(0.75,0) B7(-0.75,0) B8(-1.75,0)
  oval 1x2 / inner oval 1x2 / far side oval 1.3x2.3 hole 0.6 slot 1.7 at 90 deg: S1(-4.32,-0.915)
  oval 1x1.6 / inner oval 1x1.6 / far side oval 1.3x2 hole 0.6 slot 1.2 at 90 deg: S1(-4.32,-5.095) S1(4.32,-5.095)
  oval 1x2.1 / inner oval 1x2.1 / far side oval 1.3x2.3 hole 0.6 slot 1.7 at 90 deg: S1(4.32,-0.915)
  round 0 hole 0.65 unplated: ""(-2.89,-1.445) ""(2.89,-1.445)
  body extent -4.47,-7.72 4.47,0.18, height 3.21
YSX321SL [mm]
  rect 1.4x1.2 smd: 1(-1.1,-0.85) 2(1.1,-0.85) 3(1.1,0.85) 4(-1.1,0.85)

## Part data
C301: library part Cap, "Capacitor", LCSC MFG="Samsung Electro-Mechanics", LCSC Part #=C15849, MFG=KEMET, MFGPN=C0603C104M5RACTU, MRF.Part=CL10A105KB8NNNC, Version="0603 imperial"
C302 C303 C307: library part Cap, "Capacitor", LCSC MFG=YAGEO, LCSC Part #=C14663, MFG=KEMET, MFGPN=C0603C104M5RACTU, MRF.Part=CC0603KRX7R9BB104, Version="0603 imperial"
C304: library part Cap, "Capacitor", LCSC MFG="Guangdong Fenghua Advanced Tech", LCSC Part #=C29823, MFG=KEMET, MFGPN=C0603C104M5RACTU, MRF.Part=1206B475K500NT, Version="1206 imperial"
C305 C306: library part Cap, "Capacitor", LCSC MFG="Samsung Electro-Mechanics", LCSC Part #=C159790, MFG=KEMET, MFGPN=C0603C104M5RACTU, MRF.Part=CL10C360JB8NNNC, Version="0603 imperial"
CON301: LCSC MFG="Korean Hroparts Elec", LCSC Part #=C165948, MFG="Korean Hroparts Elec", MFGPN=TYPE-C-31-M-12, MRF.Part=TYPE-C-31-M-12
CON303: "Header, 2-Pin"
CON304: "JST for USB daughter board", LCSC MFG="JST Sales America", LCSC Part #=C160404, MFG="JST Sales America Inc.", MFGPN=SM04B-SRSS-TB(LF)(SN), MRF.Part=SM04B-SRSS-TB(LF)(SN)
CON305: library part "Header 3X2", "TagConnect header"
D201 D202 D203 D204 D205 D206 D207 D208 D209 D210 D211 D212 D213 D214 D215 D216 D217 D218 D219 D220 D221 D222 D223 D224 D225 D226 D227 D228 D229 D230 D231 D232 D233 D234 D235 D236 D237 D238 D239 D240 D241 D242 D243 D244 D245 D246 D247 D248 D249 D250 D251 D252 D253 D254 D255 D256 D257 D258 D259 D260 D261 D262 D263 D264 D265 D266: "Default Diode", LCSC MFG="Brightking Elec (TAIWAN)", LCSC Part #=C109002, MFG="Bourns Inc.", MFGPN=CD0603-B0340R, MRF.Part=CD4148WTP, Version="0603 imperial"
F301: "Thermal Fuse", LCSC MFG="Shenzhen JDT Fuse", LCSC Part #=C135338, MFG="Bel Fuse Inc.", MFGPN=0ZCJ0050FF2G, MRF.Part=ASMD1206-050
R301 R302 R307: "Resistor", LCSC MFG="Uniroyal Elec", LCSC Part #=C25804, MFG="Panasonic Electronic Components", MFGPN=ERJ-3EKF5101V, MRF.Part=0603WAF1002T5E, Version="0603 imperial"
R303 R304: "Resistor", LCSC MFG="Uniroyal Elec", LCSC Part #=C23186, MFG="Panasonic Electronic Components", MFGPN=ERJ-3EKF5101V, MRF.Part=0603WAF5101T5E, Version="0603 imperial"
R305 R306: "Resistor", LCSC MFG="Uniroyal Elec", LCSC Part #=C23345, MFG="Panasonic Electronic Components", MFGPN=ERJ-3EKF5101V, MRF.Part=0603WAF220JT5E, Version="0603 imperial"
S201 S202 S203 S204 S205 S206 S207 S208 S209 S210 S211 S212 S213 S214 S216 S217 S218 S219 S220 S221 S222 S223 S224 S225 S226 S227 S228 S229 S230 S231 S232 S233 S234 S235 S236 S237 S238 S239 S240 S241 S242 S243 S244 S245 S246 S247 S248 S249 S250 S251 S252 S253 S254 S256 S257 S258 S259 S260 S261 S262 S263 S264 S265 S266 S269: library part SW-PB, "Switch"
S215: library part SW-PB, "TAB"
S301 S302: "Switch", LCSC MFG="XKB Enterprise", LCSC Part #=C318888, MFG=C&K, MFGPN="PTS645SM43SMTR92 LFS", MRF.Part=TS-1187A-C-D-B
U301: LCSC MFG="Microchip Tech", LCSC Part #=C57345, MFG="Microchip Technology", MFGPN=ATMEGA32U2-AUR, MRF.Part=ATMEGA32U2-MU
X301: "Crystal Oscillator", LCSC MFG="Yangxing Tech", LCSC Part #=C112572, MRF.Part=X503216MSB2GI

## Free pads (board coordinates)
  round 1.152 hole 1.152 unplated paste+0.148 mask+0.148: ""(-282.194,91.313) ""(-281.94,3.048)
  round 0 hole 2.5 slot 5 at 0 deg: ""(-260.05,9.215) ""(-26.25,9.215)
  round 6 hole 2.5 slot 5 at 0 deg: ""(-260.05,66.715)
  round 0 hole 1 slot 5 at 90 deg unplated: ""(-209.169,9.215) ""(-75.819,9.215)
  round 0 hole 2.5 slot 5 at 0 deg unplated: ""(-190.119,9.45) ""(-189.992,85.542) ""(-161.423,66.548) ""(-128.212,47.5) ""(-123.323,66.294) ""(-75.692,85.542)
  round 0 hole 3 slot 5 at 0 deg unplated: ""(-147.123,47.742)
  round 0 hole 1 slot 200 at 0 deg unplated mask+0.15: ""(-142.5,37.79) ""(-142.5,75.819)
  round 6 hole 2.5 slot 5 at 0 deg unplated: ""(-25.2,66.365)

## Via types
v1: diameter 1, hole 0.5, Component Side to Bottom Layer, tented both sides, 119 vias
v2: diameter 1, hole 0.5, Component Side to Bottom Layer, tented bottom, 5 vias

## Nets (pads, with @x,y where several pads share a name; then routed paths per layer and width w, separated by ;. In a path a pad name is that pad's centre, name@x,y a point inside that pad or via, vN(x,y) a via of type N, cw(c..) or ccw(c..) an arc to the next point about the centre after c; other vN are vias at no path point)
col1: S201.2 S215.2 S229.2 S243.2 S257.1 U301.26 | length 164.5
  Component Side w0.254: U301.26@-50.371,57.337 -50.294,57.26 cw(c-50.912,56.642) -50.038,56.642 -50.038,56.522 ccw(c-48.64,56.522) U301.26@-49.629,55.534 -49.616,55.522 ccw(c-47.879,57.259) -49.615,55.521 ccw(c-47.879,57.259) -47.879,54.802 -44.944,54.802 cw(c-44.944,52.846) -43.779,54.417 cw(c-44.944,52.846) -43.561,54.229 ccw(c-42.641,55.149) -42.641,53.848 -32.871,53.848 ccw(c-32.871,54.715) -32.258,54.102 cw(c-31.498,53.342) -31.498,54.417 -6.511,54.417 cw(c-6.511,51.877) -3.971,51.877 S229.2@-3.971,49.855 -5.823,51.707 ccw(c-7.619,49.911) -7.619,52.451 -7.718,52.451 ccw(c-7.718,50.234) -9.285,51.802 ccw(c-7.787,50.303) -9.906,50.303 ccw(c-7.426,50.303) -9.18,48.55 cw(c-10.492,47.237) -8.636,47.237 cw(c-10.766,47.237) -9.26,45.731 ccw(c-7.464,43.935) -10.004,43.935 S229.2@-10.004,42.235 ; S257.1@-21.472,6.675 -21.472,11.755 cw(c-18.932,11.755) -18.932,14.295 S257.1@-17.821,14.295 -17.821,24.455 ccw(c-19.091,24.455) S243.2@-19.091,25.725 -22.931,25.725 -24.003,26.797 -24.003,29.591 -20.193,33.401 v1(-16.092,33.401) S243.2@-13.496,30.805 ; S201.2@-16.71,82.875 -16.71,75.438 ccw(c-14.17,75.438) -14.17,72.898 -8.892,72.898 cw(c-8.892,70.358) -6.352,70.358 S215.2@-6.352,68.905
  Bottom Layer w0.254: v1(-16.092,33.401) -10.65,38.843 ccw(c-12.446,40.639) -9.906,40.639 v1(-9.906,44.45) ; v1(-6.477,70.993) -6.477,54.737 v1(-6.223,54.483)
col2: S202.2 S216.2 S230.2 S244.1 S258.2 U301.25 | length 170
  Component Side w0.254: U301.25@-50.725,56.983 -50.725,56.249 ccw(c-48.914,56.249) U301.25@-50.194,54.968 -48.777,53.551 S230.2@-48.777,52.395 -47.198,53.975 v1(-46.863,53.975) ; S216.2@-44.015,71.445 -44.015,71.374 ccw(c-41.475,71.374) v1@-41.475,68.834 ; v1(-41.529,68.834) v1@-41.475,68.834 ; S258.2@-31.211,4.135 -25.654,4.135 ccw(c-25.654,6.675) -23.114,6.675 -23.114,9.215 ccw(c-25.654,9.215) -25.654,11.755 S258.2@-27.783,11.755 -27.783,21.934 cw(c-26.603,21.934) S244.1@-26.603,23.114 -26.603,23.555 v1(-29.464,26.416) ; S202.2@-21.91,80.335 cw(c-24.394,80.335) -24.394,77.851 -29.428,77.851 ccw(c-29.428,75.311) -31.224,77.107 -38.753,69.578 cw(c-40.549,71.374) -40.549,68.834 v1@-41.475,68.834
  Bottom Layer w0.254: v1(-41.529,68.834) -44.831,68.834 ccw(c-44.831,66.802) -46.863,66.802 -46.863,66.284 cw(c-49.403,66.284) -49.182,63.754 -58.203,63.754 ccw(c-58.203,60.76) -58.433,63.745 cw(c-58.453,63.998) -58.453,63.744 -59.563,63.744 -63.075,63.744 ccw(c-63.075,61.849) -64.97,61.849 -64.97,58.539 ccw(c-63.627,58.539) -63.627,57.196 -63.438,57.196 cw(c-63.438,55.257) -61.892,56.428 cw(c-62.095,56.275) -61.841,56.279 ccw(c-60.061,56.307) -61.499,55.257 ccw(c-60.061,56.307) -60.061,54.527 -59.084,54.527 cw(c-59.083,54.273) -59.05,54.525 cw(c-59.24,53.028) -58.172,54.094 -58.028,53.95 ccw(c-55.59,56.388) -57.616,53.598 -57.044,53.183 -55.985,52.415 -55.984,52.414 -55.666,52.183 cw(c-55.814,51.977) -55.561,51.999 ccw(c-54.737,52.07) -55.542,51.879 ccw(c-54.737,52.07) -54.62,51.251 -54.248,51.251 ccw(c-54.248,53.613) -52.578,51.943 -51.29,53.231 cw(c-49.494,51.435) -49.494,53.975 v1(-46.863,53.975) -49.24,51.598 ccw(c-47.443,49.802) -49.983,49.802 -49.983,42.498 ccw(c-47.465,42.498) -47.465,39.979 -42.624,39.979 cw(c-42.624,38.166) -41.972,39.858 cw(c-42.624,38.166) -40.932,38.818 cw(c-42.624,38.166) -40.811,38.166 -40.811,37.414 ; -40.802,37.602 -40.802,34.462 ccw(c-38.262,34.462) -38.262,31.922 -32.004,31.922 cw(c-32.004,29.382) -31.488,31.869 cw(c-32.004,29.382) -29.517,29.898 cw(c-32.004,29.382) -29.464,29.382 v1(-29.464,26.416)